# EAGLE board Zcontrol5XR2_Production_Mirror (EAGLE 5.10)
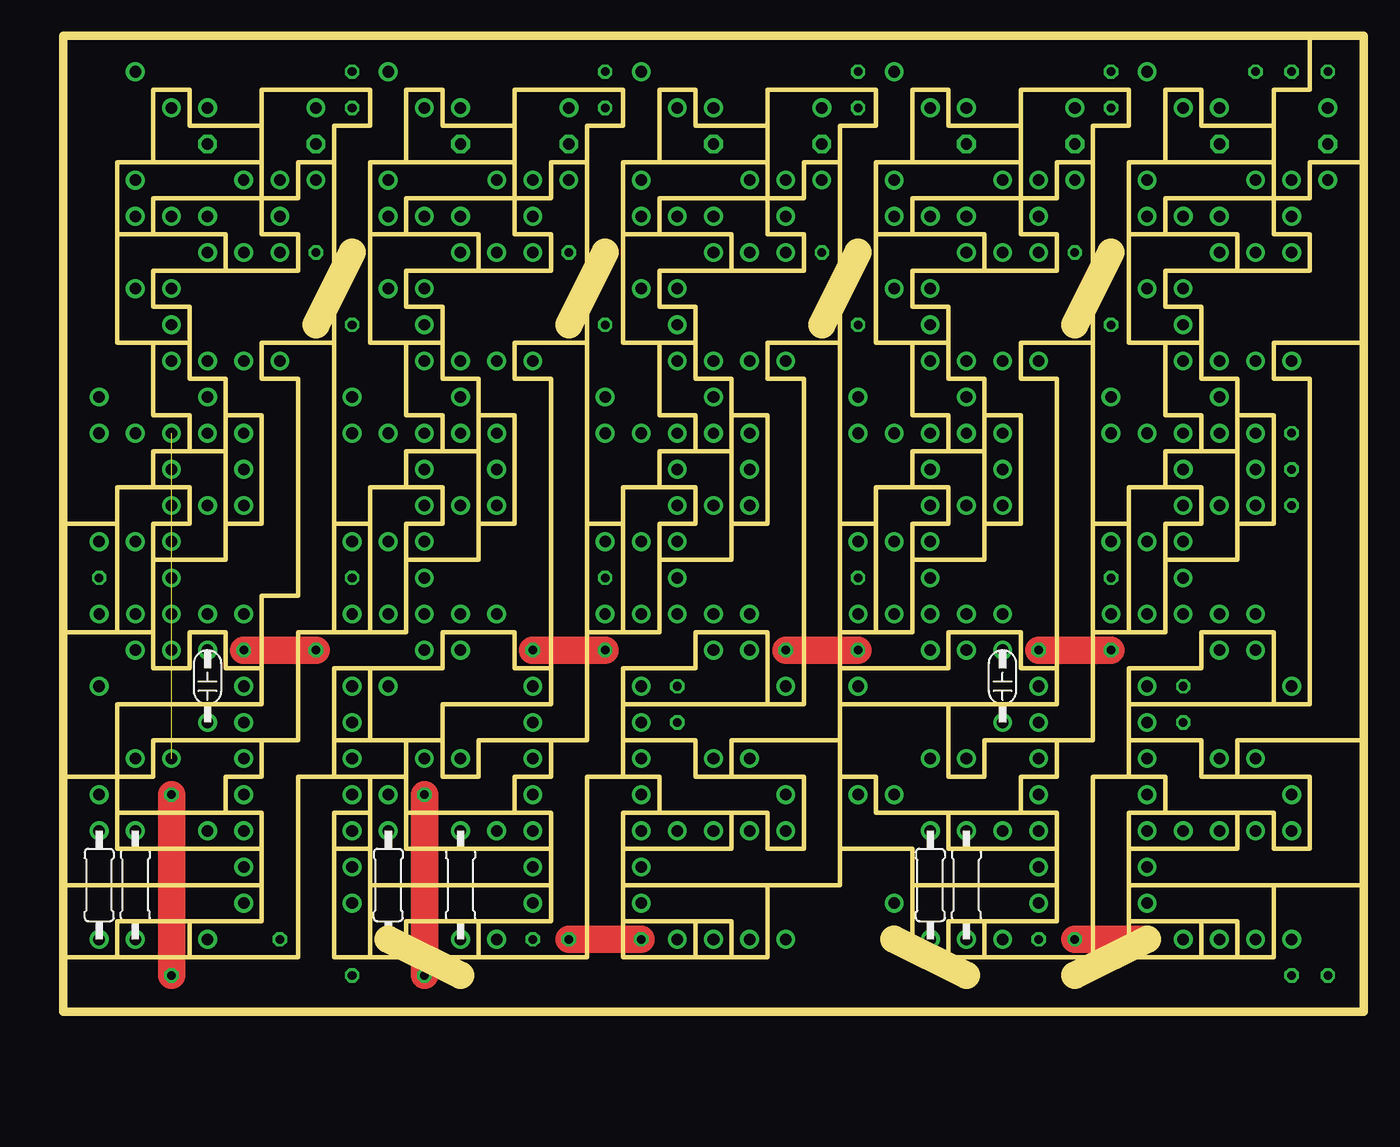
[diagram p0: board, top side]
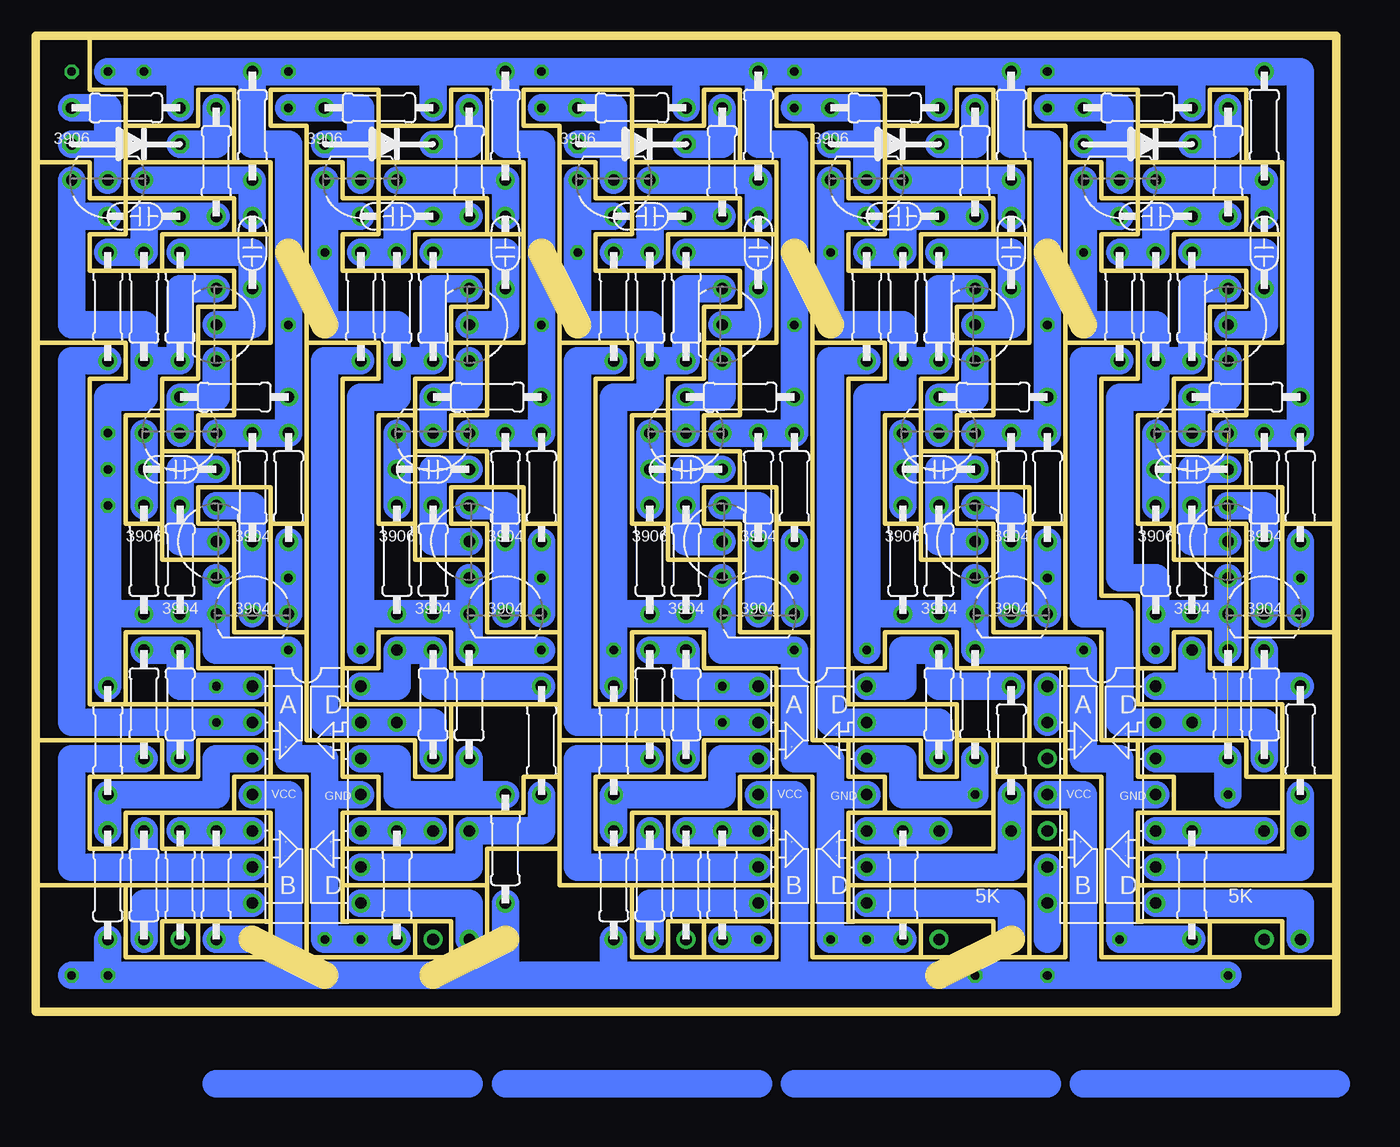
[diagram p1: board, bottom side, seen from below]

Size 91.44 x 68.58 mm. Coordinates in mm from the lower left corner, seen from the top.
Outline: 0,3.81 0,0 91.44,0 91.44,8.89
Outline: 0,3.81 0,8.89
Outline: 0,8.89 0,16.51
Outline: 0,16.51 0,26.67
Outline: 0,26.67 0,34.29
Outline: 0,34.29 0,68.58 87.63,68.58
Outline: 87.63,68.58 91.44,68.58 91.44,59.69
Outline: 91.44,59.69 91.44,46.99
Outline: 91.44,46.99 91.44,19.05
Outline: 91.44,19.05 91.44,8.89
Outline: 91.44,8.89 85.09,8.89
Outline: 85.09,8.89 85.09,3.81 82.55,3.81
Outline: 82.55,3.81 80.01,3.81
Outline: 80.01,3.81 74.93,3.81 74.93,6.35
Outline: 74.93,6.35 74.93,8.89
Outline: 74.93,8.89 74.93,11.43
Outline: 74.93,11.43 74.93,13.97 77.47,13.97
Outline: 77.47,13.97 77.47,16.51 74.93,16.51
Outline: 74.93,16.51 72.39,16.51 72.39,3.81 64.77,3.81
Outline: 64.77,3.81 62.23,3.81
Outline: 62.23,3.81 59.69,3.81 59.69,8.89
Outline: 46.99,3.81 49.53,3.81 49.53,8.89
Outline: 46.99,3.81 44.45,3.81
Outline: 44.45,3.81 39.37,3.81 39.37,6.35
Outline: 39.37,6.35 39.37,8.89
Outline: 39.37,8.89 39.37,11.43
Outline: 39.37,11.43 39.37,13.97 41.91,13.97
Outline: 41.91,13.97 41.91,16.51 39.37,16.51
Outline: 39.37,16.51 36.83,16.51 36.83,3.81 29.21,3.81
Outline: 29.21,3.81 24.13,3.81
Outline: 24.13,3.81 21.59,3.81
Outline: 21.59,3.81 19.05,3.81 19.05,11.43
Outline: 19.05,11.43 19.05,13.97 21.59,13.97
Outline: 21.59,13.97 21.59,16.51
Outline: 21.59,16.51 19.05,16.51
Outline: 19.05,16.51 16.51,16.51 16.51,3.81 8.89,3.81
Outline: 8.89,3.81 3.81,3.81
Outline: 3.81,3.81 0,3.81
Outline: 29.21,3.81 29.21,6.35
Outline: 29.21,6.35 34.29,6.35 34.29,8.89
Outline: 34.29,8.89 34.29,11.43
Outline: 34.29,11.43 34.29,13.97 31.75,13.97
Outline: 31.75,13.97 31.75,16.51 34.29,16.51 34.29,19.05
Outline: 34.29,19.05 36.83,19.05 36.83,26.67
Outline: 36.83,26.67 39.37,26.67
Outline: 39.37,26.67 41.91,26.67 41.91,31.75
Outline: 46.99,41.91 49.53,41.91 49.53,34.29 46.99,34.29
Outline: 46.99,41.91 46.99,44.45 44.45,44.45 44.45,46.99
Outline: 44.45,46.99 44.45,49.53 41.91,49.53 41.91,52.07 46.99,52.07
Outline: 46.99,52.07 52.07,52.07 52.07,54.61 49.53,54.61 49.53,57.15
Outline: 49.53,57.15 52.07,57.15 52.07,59.69 54.61,59.69
Outline: 54.61,59.69 54.61,46.99
Outline: 54.61,46.99 49.53,46.99 49.53,44.45 52.07,44.45 52.07,21.59 49.53,21.59
Outline: 49.53,21.59 49.53,26.67 44.45,26.67 44.45,24.13 39.37,24.13 39.37,21.59
Outline: 39.37,21.59 39.37,19.05
Outline: 39.37,19.05 39.37,16.51
Outline: 39.37,21.59 49.53,21.59
Outline: 39.37,19.05 44.45,19.05 44.45,16.51 46.99,16.51
Outline: 46.99,16.51 46.99,19.05 54.61,19.05
Outline: 54.61,19.05 54.61,21.59
Outline: 54.61,21.59 54.61,24.13
Outline: 54.61,24.13 54.61,26.67
Outline: 54.61,26.67 54.61,34.29
Outline: 54.61,34.29 54.61,46.99
Outline: 39.37,8.89 49.53,8.89
Outline: 46.99,3.81 46.99,6.35 44.45,6.35
Outline: 44.45,6.35 39.37,6.35
Outline: 44.45,6.35 44.45,3.81
Outline: 21.59,3.81 21.59,8.89
Outline: 21.59,8.89 21.59,11.43
Outline: 21.59,11.43 21.59,13.97
Outline: 19.05,11.43 21.59,11.43
Outline: 21.59,8.89 34.29,8.89
Outline: 29.21,6.35 24.13,6.35 24.13,3.81
Outline: 34.29,11.43 24.13,11.43 24.13,13.97
Outline: 24.13,13.97 31.75,13.97
Outline: 34.29,19.05 29.21,19.05 29.21,16.51 26.67,16.51 26.67,19.05
Outline: 26.67,19.05 24.13,19.05
Outline: 24.13,19.05 24.13,16.51
Outline: 24.13,16.51 24.13,13.97
Outline: 21.59,16.51 24.13,16.51
Outline: 19.05,16.51 19.05,19.05
Outline: 19.05,19.05 21.59,19.05
Outline: 21.59,19.05 24.13,19.05
Outline: 19.05,19.05 19.05,24.13 21.59,24.13
Outline: 21.59,24.13 21.59,19.05
Outline: 26.67,19.05 26.67,21.59 34.29,21.59 34.29,24.13
Outline: 34.29,24.13 31.75,24.13 31.75,26.67 26.67,26.67 26.67,24.13 21.59,24.13
Outline: 0,8.89 13.97,8.89
Outline: 13.97,8.89 13.97,6.35 8.89,6.35
Outline: 8.89,6.35 3.81,6.35 3.81,3.81
Outline: 8.89,3.81 8.89,6.35
Outline: 13.97,8.89 13.97,11.43
Outline: 13.97,11.43 13.97,13.97 11.43,13.97
Outline: 11.43,13.97 11.43,16.51 13.97,16.51 13.97,19.05
Outline: 13.97,19.05 16.51,19.05 16.51,26.67 19.05,26.67
Outline: 19.05,26.67 21.59,26.67
Outline: 21.59,26.67 24.13,26.67 24.13,31.75
Outline: 24.13,31.75 29.21,31.75 29.21,34.29
Outline: 29.21,34.29 31.75,34.29 31.75,41.91 29.21,41.91
Outline: 29.21,41.91 29.21,44.45 26.67,44.45 26.67,46.99
Outline: 26.67,46.99 26.67,49.53 24.13,49.53 24.13,52.07 29.21,52.07
Outline: 29.21,52.07 34.29,52.07 34.29,54.61 31.75,54.61 31.75,57.15
Outline: 31.75,57.15 34.29,57.15 34.29,59.69 36.83,59.69
Outline: 36.83,59.69 36.83,46.99
Outline: 36.83,46.99 31.75,46.99 31.75,44.45 34.29,44.45 34.29,24.13
Outline: 19.05,26.67 19.05,34.29
Outline: 19.05,34.29 21.59,34.29
Outline: 21.59,34.29 21.59,26.67
Outline: 21.59,34.29 21.59,36.83 24.13,36.83
Outline: 24.13,36.83 26.67,36.83 26.67,34.29 24.13,34.29 24.13,31.75
Outline: 24.13,36.83 24.13,39.37 26.67,39.37
Outline: 26.67,39.37 29.21,39.37
Outline: 29.21,39.37 29.21,34.29
Outline: 29.21,39.37 29.21,41.91
Outline: 26.67,39.37 26.67,41.91 24.13,41.91 24.13,46.99
Outline: 24.13,46.99 21.59,46.99 21.59,54.61
Outline: 24.13,46.99 26.67,46.99
Outline: 19.05,46.99 19.05,59.69
Outline: 19.05,59.69 19.05,62.23 21.59,62.23 21.59,64.77 13.97,64.77 13.97,62.23
Outline: 13.97,62.23 8.89,62.23 8.89,64.77 6.35,64.77 6.35,59.69
Outline: 3.81,54.61 3.81,59.69 6.35,59.69
Outline: 3.81,54.61 3.81,46.99 6.35,46.99
Outline: 8.89,39.37 8.89,41.91 6.35,41.91 6.35,46.99
Outline: 8.89,39.37 6.35,39.37 6.35,36.83
Outline: 21.59,54.61 21.59,59.69 24.13,59.69
Outline: 31.75,62.23 26.67,62.23 26.67,64.77 24.13,64.77 24.13,59.69
Outline: 31.75,62.23 31.75,64.77 39.37,64.77 39.37,62.23 36.83,62.23 36.83,59.69
Outline: 21.59,54.61 24.13,54.61
Outline: 24.13,54.61 29.21,54.61 29.21,52.07
Outline: 24.13,54.61 24.13,57.15 31.75,57.15
Outline: 31.75,57.15 31.75,59.69
Outline: 31.75,62.23 31.75,59.69
Outline: 31.75,59.69 24.13,59.69
Outline: 54.61,59.69 54.61,62.23 57.15,62.23 57.15,64.77 49.53,64.77 49.53,62.23
Outline: 49.53,59.69 49.53,57.15
Outline: 49.53,57.15 41.91,57.15 41.91,54.61
Outline: 41.91,54.61 46.99,54.61 46.99,52.07
Outline: 49.53,59.69 41.91,59.69
Outline: 41.91,59.69 39.37,59.69 39.37,54.61
Outline: 39.37,54.61 39.37,46.99 41.91,46.99
Outline: 41.91,46.99 41.91,41.91 44.45,41.91 44.45,39.37
Outline: 44.45,39.37 41.91,39.37 41.91,36.83
Outline: 41.91,46.99 44.45,46.99
Outline: 41.91,54.61 39.37,54.61
Outline: 41.91,59.69 41.91,64.77 44.45,64.77 44.45,62.23 49.53,62.23
Outline: 49.53,62.23 49.53,59.69
Outline: 6.35,59.69 13.97,59.69
Outline: 13.97,59.69 13.97,62.23
Outline: 3.81,54.61 6.35,54.61
Outline: 6.35,54.61 6.35,57.15 13.97,57.15
Outline: 13.97,57.15 13.97,59.69
Outline: 13.97,57.15 16.51,57.15 16.51,59.69 19.05,59.69
Outline: 67.31,62.23 67.31,59.69
Outline: 67.31,59.69 59.69,59.69
Outline: 59.69,59.69 59.69,64.77 62.23,64.77 62.23,62.23 67.31,62.23
Outline: 67.31,62.23 67.31,64.77 74.93,64.77 74.93,62.23 72.39,62.23 72.39,59.69
Outline: 72.39,59.69 69.85,59.69 69.85,57.15 67.31,57.15
Outline: 67.31,57.15 67.31,59.69
Outline: 59.69,59.69 57.15,59.69 57.15,54.61
Outline: 57.15,54.61 57.15,46.99 59.69,46.99
Outline: 59.69,46.99 59.69,41.91 62.23,41.91 62.23,39.37
Outline: 62.23,39.37 59.69,39.37 59.69,36.83
Outline: 91.44,59.69 87.63,59.69 87.63,57.15 85.09,57.15
Outline: 85.09,57.15 85.09,59.69
Outline: 85.09,59.69 85.09,62.23
Outline: 85.09,62.23 85.09,64.77 87.63,64.77 87.63,68.58
Outline: 77.47,59.69 74.93,59.69 74.93,54.61
Outline: 74.93,54.61 74.93,46.99 77.47,46.99
Outline: 77.47,46.99 77.47,41.91 80.01,41.91 80.01,39.37
Outline: 80.01,39.37 77.47,39.37 77.47,36.83
Outline: 72.39,46.99 72.39,59.69
Outline: 77.47,59.69 77.47,64.77 80.01,64.77 80.01,62.23 85.09,62.23
Outline: 85.09,59.69 77.47,59.69
Outline: 85.09,57.15 77.47,57.15 77.47,54.61
Outline: 77.47,54.61 74.93,54.61
Outline: 67.31,57.15 59.69,57.15 59.69,54.61
Outline: 59.69,54.61 57.15,54.61
Outline: 85.09,57.15 85.09,54.61 87.63,54.61 87.63,52.07 82.55,52.07
Outline: 82.55,52.07 82.55,54.61 77.47,54.61
Outline: 67.31,57.15 67.31,54.61 69.85,54.61 69.85,52.07 64.77,52.07
Outline: 64.77,52.07 64.77,54.61 59.69,54.61
Outline: 72.39,46.99 67.31,46.99 67.31,44.45 69.85,44.45 69.85,24.13
Outline: 69.85,24.13 69.85,21.59 62.23,21.59
Outline: 62.23,21.59 62.23,16.51 64.77,16.51 64.77,19.05 69.85,19.05
Outline: 69.85,19.05 72.39,19.05 72.39,26.67
Outline: 72.39,26.67 72.39,34.29
Outline: 72.39,34.29 72.39,46.99
Outline: 85.09,21.59 87.63,21.59 87.63,44.45 85.09,44.45 85.09,46.99 91.44,46.99
Outline: 85.09,21.59 74.93,21.59
Outline: 74.93,21.59 74.93,19.05
Outline: 74.93,19.05 80.01,19.05 80.01,16.51 82.55,16.51
Outline: 82.55,16.51 82.55,19.05 91.44,19.05
Outline: 77.47,46.99 80.01,46.99
Outline: 80.01,46.99 80.01,49.53 77.47,49.53 77.47,52.07 82.55,52.07
Outline: 59.69,46.99 62.23,46.99
Outline: 62.23,46.99 62.23,49.53 59.69,49.53 59.69,52.07 64.77,52.07
Outline: 6.35,46.99 8.89,46.99
Outline: 8.89,46.99 8.89,49.53 6.35,49.53 6.35,52.07 11.43,52.07
Outline: 11.43,52.07 11.43,54.61 6.35,54.61
Outline: 11.43,52.07 16.51,52.07 16.51,54.61 13.97,54.61 13.97,57.15
Outline: 11.43,34.29 13.97,34.29 13.97,41.91 11.43,41.91
Outline: 11.43,34.29 11.43,39.37
Outline: 11.43,39.37 11.43,41.91
Outline: 46.99,34.29 46.99,39.37
Outline: 46.99,39.37 46.99,41.91
Outline: 64.77,41.91 67.31,41.91 67.31,34.29 64.77,34.29
Outline: 64.77,41.91 64.77,39.37
Outline: 64.77,39.37 64.77,34.29
Outline: 82.55,34.29 85.09,34.29 85.09,41.91 82.55,41.91
Outline: 82.55,34.29 82.55,39.37
Outline: 82.55,39.37 82.55,41.91
Outline: 82.55,39.37 80.01,39.37
Outline: 64.77,39.37 62.23,39.37
Outline: 44.45,39.37 46.99,39.37
Outline: 8.89,39.37 11.43,39.37
Outline: 11.43,41.91 11.43,44.45 8.89,44.45 8.89,46.99
Outline: 82.55,34.29 82.55,31.75 77.47,31.75
Outline: 77.47,31.75 77.47,34.29 80.01,34.29 80.01,36.83 77.47,36.83
Outline: 64.77,34.29 64.77,31.75 59.69,31.75
Outline: 59.69,31.75 59.69,34.29 62.23,34.29 62.23,36.83 59.69,36.83
Outline: 41.91,31.75 41.91,34.29 44.45,34.29 44.45,36.83 41.91,36.83
Outline: 41.91,31.75 46.99,31.75 46.99,34.29
Outline: 11.43,34.29 11.43,31.75 6.35,31.75
Outline: 6.35,31.75 6.35,34.29 8.89,34.29 8.89,36.83 6.35,36.83
Outline: 72.39,26.67 74.93,26.67
Outline: 74.93,26.67 74.93,34.29
Outline: 74.93,34.29 72.39,34.29
Outline: 54.61,26.67 57.15,26.67
Outline: 57.15,26.67 57.15,34.29
Outline: 57.15,34.29 54.61,34.29
Outline: 36.83,26.67 36.83,34.29
Outline: 36.83,34.29 39.37,34.29
Outline: 39.37,34.29 39.37,26.67
Outline: 3.81,26.67 0,26.67
Outline: 3.81,26.67 3.81,34.29
Outline: 3.81,34.29 0,34.29
Outline: 3.81,34.29 3.81,36.83 6.35,36.83
Outline: 6.35,31.75 6.35,26.67
Outline: 6.35,26.67 3.81,26.67
Outline: 39.37,34.29 39.37,36.83 41.91,36.83
Outline: 57.15,26.67 59.69,26.67 59.69,31.75
Outline: 57.15,34.29 57.15,36.83 59.69,36.83
Outline: 74.93,26.67 77.47,26.67 77.47,31.75
Outline: 74.93,34.29 74.93,36.83 77.47,36.83
Outline: 36.83,34.29 36.83,46.99
Outline: 19.05,34.29 19.05,46.99
Outline: 19.05,46.99 13.97,46.99 13.97,44.45 16.51,44.45 16.51,29.21 13.97,29.21 13.97,24.13
Outline: 13.97,24.13 13.97,21.59 3.81,21.59 3.81,16.51
Outline: 3.81,16.51 6.35,16.51 6.35,19.05 13.97,19.05
Outline: 11.43,13.97 3.81,13.97
Outline: 3.81,13.97 3.81,16.51
Outline: 3.81,16.51 0,16.51
Outline: 13.97,11.43 3.81,11.43 3.81,13.97
Outline: 13.97,24.13 11.43,24.13 11.43,26.67 8.89,26.67 8.89,24.13 6.35,24.13 6.35,26.67
Outline: 49.53,8.89 54.61,8.89 54.61,11.43
Outline: 54.61,11.43 54.61,16.51
Outline: 54.61,16.51 54.61,19.05
Outline: 46.99,16.51 52.07,16.51 52.07,11.43 49.53,11.43 49.53,13.97 46.99,13.97
Outline: 46.99,13.97 46.99,11.43 39.37,11.43
Outline: 41.91,13.97 46.99,13.97
Outline: 69.85,19.05 69.85,16.51 67.31,16.51 67.31,13.97
Outline: 67.31,13.97 69.85,13.97 69.85,11.43
Outline: 69.85,11.43 69.85,8.89
Outline: 69.85,8.89 69.85,6.35 64.77,6.35
Outline: 64.77,6.35 64.77,3.81
Outline: 62.23,3.81 62.23,6.35 64.77,6.35
Outline: 69.85,8.89 59.69,8.89
Outline: 59.69,8.89 59.69,11.43 54.61,11.43
Outline: 69.85,11.43 62.23,11.43 62.23,13.97
Outline: 62.23,13.97 57.15,13.97 57.15,16.51 54.61,16.51
Outline: 62.23,13.97 67.31,13.97
Outline: 62.23,21.59 54.61,21.59
Outline: 54.61,24.13 62.23,24.13 62.23,26.67 67.31,26.67 67.31,24.13 69.85,24.13
Outline: 74.93,21.59 74.93,24.13 80.01,24.13 80.01,26.67 85.09,26.67 85.09,21.59
Outline: 82.55,41.91 82.55,44.45 80.01,44.45 80.01,46.99
Outline: 80.01,3.81 80.01,6.35
Outline: 80.01,6.35 82.55,6.35 82.55,3.81
Outline: 85.09,8.89 74.93,8.89
Outline: 74.93,6.35 80.01,6.35
Outline: 74.93,11.43 82.55,11.43 82.55,13.97
Outline: 82.55,13.97 85.09,13.97 85.09,11.43 87.63,11.43 87.63,16.51 82.55,16.51
Outline: 77.47,13.97 82.55,13.97
Outline: 74.93,19.05 74.93,16.51
Outline: 64.77,41.91 64.77,44.45 62.23,44.45 62.23,46.99
Copper layers (1*16): Top 0.035mm / dielectric 1.5mm / Bottom 0.035mm
Design rules "default": minimum track width 10mil, minimum drill 24mil, track to track 8mil, track to pad 8mil, pad to pad 8mil, via to via 8mil, smd to smd 8mil, copper to edge 40mil, drill to drill 8mil, minimum pad ring 10mil, minimum via ring 8mil, stop-mask expansion 4mil, vias tented up to drill 0mil, thermal gap 10mil
Milling: 7 lines

## Footprints (pad centres in the part's own frame; a part is rotated, then mirrored left to right if it is on the bottom)
SMALL-CAPACITOR = drill 0.813 round: IN1 0,0; IN2 5.08,0
TRANSISTOR = drill 0.8 round: P$1 0,0; P$2 2.54,0; P$3 -2.54,0
DIODE = drill 0.8 octagon: P$1 -3.81,0; P$2 3.81,0
RESISTOR = drill 0.813 round: IN1 -3.81,0; IN2 3.81,0
LM324-QUAD-OPAMP = drill 0.813 round: AMINUS -3.81,5.08; AOUT -3.81,7.62; APLUS -3.81,2.54; BMINUS -3.81,-5.08; BOUT -3.81,-7.62; BPLUS -3.81,-2.54; CMINUS 3.81,5.08; COUT 3.81,7.62; CPLUS 3.81,2.54; DMINUS 3.81,-5.08; DOUT 3.81,-7.62; DPLUS 3.81,-2.54; GND 3.81,0; VCC -3.81,0

## Placement (x,y rotation side)
E$2  50nF  [SMALL-CAPACITOR]  66.04,20.32 90 top
E$3  [TRANSISTOR]  86.36,58.42 180 bottom
E$5  [DIODE]  85.09,60.96 0 bottom
E$7  4k  [RESISTOR]  85.09,63.5 180 bottom
E$9  910  [RESISTOR]  78.74,59.69 270 bottom
E$10  2.2uF  [SMALL-CAPACITOR]  81.28,55.88 180 bottom
E$11  [LM324-QUAD-OPAMP]  72.39,15.24 0 bottom
E$15  100k  [RESISTOR]  83.82,49.53 90 bottom
E$16  100k  [RESISTOR]  86.36,49.53 270 bottom
E$18  [TRANSISTOR]  68.58,58.42 180 bottom
E$19  200k  [RESISTOR]  81.28,21.59 270 bottom
E$20  2k  [RESISTOR]  86.36,19.05 90 bottom
E$21  5k  [RESISTOR]  86.36,8.89 270 bottom
E$22  2k  [RESISTOR]  83.82,21.59 270 bottom
E$23  2k  [RESISTOR]  83.82,8.89 270 bottom
E$29  2k  [RESISTOR]  78.74,8.89 270 bottom
E$30  20k  [RESISTOR]  81.28,8.89 270 bottom
E$31  10K  [RESISTOR]  76.2,62.23 270 bottom
E$32  500Pf  [SMALL-CAPACITOR]  76.2,50.8 90 bottom
E$33  100K  [RESISTOR]  81.28,49.53 90 bottom
E$34  [TRANSISTOR]  78.74,48.26 270 bottom
E$35  2k  [RESISTOR]  77.47,43.18 0 bottom
E$36  [TRANSISTOR]  81.28,40.64 180 bottom
E$37  22Pf  [SMALL-CAPACITOR]  78.74,38.1 180 bottom
E$38  4k  [RESISTOR]  67.31,63.5 180 bottom
E$40  100k  [RESISTOR]  81.28,31.75 90 bottom
E$43  [TRANSISTOR]  78.74,33.02 90 bottom
E$44  2k  [RESISTOR]  76.2,36.83 90 bottom
E$45  [TRANSISTOR]  76.2,27.94 0 bottom
E$46  2k  [RESISTOR]  73.66,36.83 90 bottom
E$47  200k  [RESISTOR]  63.5,21.59 270 bottom
E$48  2k  [RESISTOR]  60.96,21.59 90 bottom
E$49  5k  [RESISTOR]  58.42,11.43 270 bottom
E$50  2k  [RESISTOR]  55.88,19.05 270 bottom
E$52  2k  [RESISTOR]  60.96,8.89 270 top
E$53  2k  [RESISTOR]  66.04,8.89 270 bottom
E$54  20k  [RESISTOR]  63.5,8.89 270 top
E$55  [DIODE]  67.31,60.96 0 bottom
E$56  910  [RESISTOR]  60.96,59.69 270 bottom
E$57  2.2uF  [SMALL-CAPACITOR]  63.5,55.88 180 bottom
E$58  100k  [RESISTOR]  66.04,49.53 90 bottom
E$59  100k  [RESISTOR]  68.58,49.53 270 bottom
E$60  10K  [RESISTOR]  58.42,62.23 270 bottom
E$61  500Pf  [SMALL-CAPACITOR]  58.42,50.8 90 bottom
E$62  100K  [RESISTOR]  63.5,49.53 90 bottom
E$63  [TRANSISTOR]  60.96,48.26 270 bottom
E$64  2k  [RESISTOR]  59.69,43.18 0 bottom
E$65  [TRANSISTOR]  63.5,40.64 180 bottom
E$66  100k  [RESISTOR]  63.5,31.75 90 bottom
E$67  [TRANSISTOR]  60.96,33.02 90 bottom
E$68  2k  [RESISTOR]  58.42,36.83 90 bottom
E$69  [TRANSISTOR]  58.42,27.94 0 bottom
E$70  2k  [RESISTOR]  55.88,36.83 90 bottom
E$71  2k  [RESISTOR]  66.04,31.75 270 bottom
E$72  22Pf  [SMALL-CAPACITOR]  60.96,38.1 180 bottom
E$73  [LM324-QUAD-OPAMP]  36.83,15.24 0 bottom
E$74  [TRANSISTOR]  50.8,58.42 180 bottom
E$75  2k  [RESISTOR]  83.82,31.75 270 bottom
E$76  4k  [RESISTOR]  49.53,63.5 180 bottom
E$77  [DIODE]  49.53,60.96 0 bottom
E$78  910  [RESISTOR]  43.18,59.69 270 bottom
E$79  2.2uF  [SMALL-CAPACITOR]  45.72,55.88 180 bottom
E$80  100k  [RESISTOR]  48.26,49.53 90 bottom
E$81  100k  [RESISTOR]  50.8,49.53 270 bottom
E$82  200k  [RESISTOR]  45.72,21.59 270 bottom
E$83  2k  [RESISTOR]  50.8,19.05 90 bottom
E$84  5k  [RESISTOR]  50.8,8.89 270 bottom
E$85  2k  [RESISTOR]  48.26,21.59 270 bottom
E$86  2k  [RESISTOR]  48.26,8.89 270 bottom
E$87  2k  [RESISTOR]  43.18,8.89 270 bottom
E$88  20k  [RESISTOR]  45.72,8.89 270 bottom
E$89  10K  [RESISTOR]  40.64,62.23 270 bottom
E$90  500Pf  [SMALL-CAPACITOR]  40.64,50.8 90 bottom
E$91  100K  [RESISTOR]  45.72,49.53 90 bottom
E$92  [TRANSISTOR]  43.18,48.26 270 bottom
E$93  2k  [RESISTOR]  41.91,43.18 0 bottom
E$94  [TRANSISTOR]  45.72,40.64 180 bottom
E$95  100k  [RESISTOR]  45.72,31.75 90 bottom
E$96  [TRANSISTOR]  43.18,33.02 90 bottom
E$97  2k  [RESISTOR]  40.64,36.83 90 bottom
E$98  [TRANSISTOR]  40.64,27.94 0 bottom
E$99  2k  [RESISTOR]  38.1,36.83 90 bottom
E$100  200k  [RESISTOR]  5.08,21.59 270 bottom
E$101  200k  [RESISTOR]  27.94,21.59 270 bottom
E$102  2k  [RESISTOR]  25.4,21.59 90 bottom
E$104  2k  [RESISTOR]  22.86,19.05 270 bottom
E$105  2k  [RESISTOR]  22.86,8.89 270 top
E$106  2k  [RESISTOR]  30.48,8.89 270 bottom
E$107  20k  [RESISTOR]  27.94,8.89 270 top
E$108  2k  [RESISTOR]  48.26,31.75 270 bottom
E$109  22Pf  [SMALL-CAPACITOR]  43.18,38.1 180 bottom
E$110  [TRANSISTOR]  33.02,58.42 180 bottom
E$111  4k  [RESISTOR]  31.75,63.5 180 bottom
E$112  [DIODE]  31.75,60.96 0 bottom
E$113  910  [RESISTOR]  25.4,59.69 270 bottom
E$114  2.2uF  [SMALL-CAPACITOR]  27.94,55.88 180 bottom
E$115  100k  [RESISTOR]  30.48,49.53 90 bottom
E$116  100k  [RESISTOR]  33.02,49.53 270 bottom
E$117  10K  [RESISTOR]  22.86,62.23 270 bottom
E$118  500Pf  [SMALL-CAPACITOR]  22.86,50.8 90 bottom
E$119  100K  [RESISTOR]  27.94,49.53 90 bottom
E$120  [TRANSISTOR]  25.4,48.26 270 bottom
E$121  2k  [RESISTOR]  24.13,43.18 0 bottom
E$122  [TRANSISTOR]  27.94,40.64 180 bottom
E$123  100k  [RESISTOR]  27.94,31.75 90 bottom
E$124  [TRANSISTOR]  25.4,33.02 90 bottom
E$125  2k  [RESISTOR]  22.86,36.83 90 bottom
E$126  [TRANSISTOR]  22.86,27.94 0 bottom
E$127  2k  [RESISTOR]  20.32,36.83 90 bottom
E$128  2k  [RESISTOR]  30.48,31.75 270 bottom
E$129  22Pf  [SMALL-CAPACITOR]  25.4,38.1 180 bottom
E$156  [LM324-QUAD-OPAMP]  16.51,15.24 0 bottom
E$157  50nF  [SMALL-CAPACITOR]  10.16,20.32 90 top
E$159  2k  [RESISTOR]  7.62,21.59 90 bottom
E$161  2k  [RESISTOR]  2.54,19.05 270 bottom
E$162  2k  [RESISTOR]  2.54,8.89 270 top
E$163  2k  [RESISTOR]  10.16,8.89 270 bottom
E$166  20k  [RESISTOR]  5.08,8.89 270 top
E$167  [TRANSISTOR]  15.24,58.42 180 bottom
E$168  4k  [RESISTOR]  13.97,63.5 180 bottom
E$169  [DIODE]  13.97,60.96 0 bottom
E$170  910  [RESISTOR]  7.62,59.69 270 bottom
E$171  2.2uF  [SMALL-CAPACITOR]  10.16,55.88 180 bottom
E$172  100k  [RESISTOR]  12.7,49.53 90 bottom
E$173  100k  [RESISTOR]  15.24,49.53 270 bottom
E$174  10K  [RESISTOR]  5.08,62.23 270 bottom
E$175  500Pf  [SMALL-CAPACITOR]  5.08,50.8 90 bottom
E$176  100K  [RESISTOR]  10.16,49.53 90 bottom
E$177  [TRANSISTOR]  7.62,48.26 270 bottom
E$178  2k  [RESISTOR]  6.35,43.18 0 bottom
E$179  [TRANSISTOR]  10.16,40.64 180 bottom
E$180  100k  [RESISTOR]  10.16,31.75 90 bottom
E$181  [TRANSISTOR]  7.62,33.02 90 bottom
E$182  2k  [RESISTOR]  5.08,36.83 90 bottom
E$183  [TRANSISTOR]  5.08,27.94 0 bottom
E$184  2k  [RESISTOR]  2.54,36.83 90 bottom
E$185  2k  [RESISTOR]  12.7,31.75 270 bottom
E$186  22Pf  [SMALL-CAPACITOR]  7.62,38.1 180 bottom

## Library data of the parts
E$2 E$3 E$5 E$7 E$9-E$11 E$15 E$16 E$18-E$23 E$29-E$38 E$40 E$43-E$50 E$52-E$102 E$104-E$129 E$156 E$157 E$159 E$161-E$163 E$166-E$186 = RussellLibrary

## Nets
GND4: E$3.P$2 E$10.IN2 E$11.GND E$15.IN1 E$18.P$2 E$20.IN2 E$29.IN2 E$33.IN1 E$34.P$3 E$40.IN1 E$43.P$3 E$45.P$3 E$48.IN2 E$53.IN2 E$57.IN2 E$58.IN1 E$62.IN1 E$63.P$3 E$66.IN1 E$67.P$3 E$69.P$3 E$73.GND E$74.P$2 E$79.IN2 E$80.IN1 E$83.IN2 E$87.IN2 E$91.IN1 E$92.P$3 E$95.IN1 E$96.P$3 E$98.P$3 E$102.IN2 E$106.IN2 E$110.P$2 E$114.IN2 E$115.IN1 E$119.IN1 E$120.P$3 E$123.IN1 E$124.P$3 E$126.P$3 E$156.GND E$159.IN2 E$163.IN2 E$167.P$2 E$171.IN2 E$172.IN1 E$176.IN1 E$177.P$3 E$180.IN1 E$181.P$3 E$183.P$3
S$1: E$3.P$1 E$5.P$1 E$7.IN2
S$2: E$5.P$2 E$9.IN1
S$4: E$9.IN2 E$10.IN1 E$15.IN2 E$16.IN1
S$5: E$11.AMINUS E$16.IN2 E$19.IN2
S$6: E$32.IN1 E$33.IN2 E$34.P$1
S$7: E$11.APLUS E$20.IN1 E$21.IN1
S$8: E$11.AOUT E$19.IN1 E$22.IN1
S$9: E$18.P$1 E$38.IN2 E$55.P$1
S$10: E$11.BMINUS E$22.IN2 E$23.IN1
S$11: E$11.BOUT E$23.IN2
S$12: E$11.BPLUS E$29.IN1 E$30.IN1
S$13: E$30.IN2
S$14: E$3.P$3 E$31.IN2 E$32.IN2
S$15: E$47.IN2 E$59.IN2
S$16: E$2.IN2 E$47.IN1 E$50.IN1
S$17: E$34.P$2 E$35.IN1 E$36.P$1
S$18: E$50.IN2 E$52.IN1
S$19: E$36.P$2 E$75.IN1
S$20: E$37.IN1 E$40.IN2 E$43.P$1
S$22: E$52.IN2
S$23: E$43.P$2 E$44.IN1 E$45.P$1
S$24: E$45.P$2 E$46.IN1
S$26: E$53.IN1 E$54.IN1
S$27: E$54.IN2
S$28: E$55.P$2 E$56.IN1
S$29: E$74.P$1 E$76.IN2 E$77.P$1
S$30: E$11.CPLUS E$48.IN1 E$49.IN1
S$31: E$18.P$3 E$60.IN2 E$61.IN2
S$32: E$61.IN1 E$62.IN2 E$63.P$1
S$33: E$63.P$2 E$64.IN1 E$65.P$1
S$34: E$66.IN2 E$67.P$1 E$72.IN1
S$35: E$67.P$2 E$68.IN1 E$69.P$1
S$36: E$69.P$2 E$70.IN1
S$37: E$65.P$2 E$71.IN1
S$38: E$56.IN2 E$57.IN1 E$58.IN2 E$59.IN1
S$39: E$77.P$2 E$78.IN1
S$40: E$73.AMINUS E$81.IN2 E$82.IN2
S$41: E$73.APLUS E$83.IN1 E$84.IN1
S$42: E$73.AOUT E$82.IN1 E$85.IN1
S$43: E$73.BMINUS E$85.IN2 E$86.IN1
S$44: E$73.BOUT E$86.IN2
S$45: E$73.BPLUS E$87.IN1 E$88.IN1
S$46: E$88.IN2
S$47: E$74.P$3 E$89.IN2 E$90.IN2
S$48: E$90.IN1 E$91.IN2 E$92.P$1
S$49: E$92.P$2 E$93.IN1 E$94.P$1
S$50: E$95.IN2 E$96.P$1 E$109.IN1
S$51: E$96.P$2 E$97.IN1 E$98.P$1
S$52: E$98.P$2 E$99.IN1
S$53: E$94.P$2 E$108.IN1
S$54: E$78.IN2 E$79.IN1 E$80.IN2 E$81.IN1
S$55: E$101.IN1 E$104.IN1
S$56: E$104.IN2 E$105.IN1
S$57: E$105.IN2
S$58: E$106.IN1 E$107.IN1
S$59: E$107.IN2
S$60: E$101.IN2 E$116.IN2
S$61: E$100.IN2 E$173.IN2
S$62: E$110.P$1 E$111.IN2 E$112.P$1
S$63: E$112.P$2 E$113.IN1
S$64: E$110.P$3 E$117.IN2 E$118.IN2
S$65: E$118.IN1 E$119.IN2 E$120.P$1
S$66: E$120.P$2 E$121.IN1 E$122.P$1
S$67: E$123.IN2 E$124.P$1 E$129.IN1
S$68: E$124.P$2 E$125.IN1 E$126.P$1
S$69: E$126.P$2 E$127.IN1
S$70: E$122.P$2 E$128.IN1
S$71: E$113.IN2 E$114.IN1 E$115.IN2 E$116.IN1
S$89: E$100.IN1 E$157.IN2 E$161.IN1
S$90: E$161.IN2 E$162.IN1
S$91: E$162.IN2
S$92: E$163.IN1 E$166.IN1
S$93: E$166.IN2
S$94: E$156.AMINUS E$156.AOUT
S$95: E$156.BMINUS E$156.BOUT
S$96: E$167.P$1 E$168.IN2 E$169.P$1
S$97: E$169.P$2 E$170.IN1
S$98: E$167.P$3 E$174.IN2 E$175.IN2
S$99: E$175.IN1 E$176.IN2 E$177.P$1
S$100: E$177.P$2 E$178.IN1 E$179.P$1
S$101: E$180.IN2 E$181.P$1 E$186.IN1
S$102: E$181.P$2 E$182.IN1 E$183.P$1
S$103: E$183.P$2 E$184.IN1
S$104: E$179.P$2 E$185.IN1
S$105: E$170.IN2 E$171.IN1 E$172.IN2 E$173.IN1
VCC2: E$7.IN1 E$11.VCC E$21.IN2 E$31.IN1 E$35.IN2 E$36.P$3 E$38.IN1 E$44.IN2 E$46.IN2 E$49.IN2 E$60.IN1 E$64.IN2 E$65.P$3 E$68.IN2 E$70.IN2 E$73.CPLUS E$73.VCC E$76.IN1 E$84.IN2 E$89.IN1 E$93.IN2 E$94.P$3 E$97.IN2 E$99.IN2 E$102.IN1 E$111.IN1 E$117.IN1 E$121.IN2 E$122.P$3 E$125.IN2 E$127.IN2 E$156.CPLUS E$156.VCC E$159.IN1 E$168.IN1 E$174.IN1 E$178.IN2 E$179.P$3 E$182.IN2 E$184.IN2

## Tracks (layer width: path | path; a pad name or v marks a point on that pad's centre or on a via)
GND4  (via drill 0.6)
  Top 1.93: v17.78,25.4 v12.7,25.4 | v38.1,25.4 v33.02,25.4 | v35.56,5.08 v40.64,5.08 | v55.88,25.4 v50.8,25.4 | v73.66,25.4 v68.58,25.4 | v76.2,5.08 v71.12,5.08
  Bottom 1.93: 17.78,55.88 E$167.P$2 | 17.78,55.88 v17.78,53.34 17.78,48.26 12.7,48.26 E$172.IN1 | 17.78,55.88 E$171.IN2 | E$172.IN1 E$176.IN1 10.16,50.8 E$177.P$3 | E$172.IN1 12.7,43.18 15.24,43.18 15.24,30.48 12.7,30.48 12.7,27.94 | 12.7,27.94 E$180.IN1 E$183.P$3 | E$183.P$3 E$181.P$3 | E$183.P$3 E$159.IN2 | 15.24,15.24 E$156.GND | 15.24,15.24 15.24,17.78 17.78,17.78 v17.78,25.4 E$102.IN2 E$126.P$3 | E$163.IN2 v15.24,5.08 15.24,15.24 | v12.7,25.4 12.7,27.94 | 35.56,55.88 E$110.P$2 | 35.56,55.88 v35.56,53.34 35.56,48.26 30.48,48.26 E$115.IN1 | 35.56,55.88 E$114.IN2 | E$115.IN1 E$119.IN1 27.94,50.8 E$120.P$3 | E$115.IN1 30.48,43.18 33.02,43.18 33.02,27.94 | E$126.P$3 E$124.P$3 | E$126.P$3 E$123.IN1 33.02,27.94 | 53.34,55.88 E$74.P$2 | 53.34,55.88 v53.34,53.34 53.34,48.26 48.26,48.26 E$80.IN1 | 53.34,55.88 E$79.IN2 | E$80.IN1 E$91.IN1 45.72,50.8 E$92.P$3 | E$80.IN1 48.26,43.18 50.8,43.18 50.8,27.94 | 50.8,27.94 v50.8,25.4 E$83.IN2 | E$98.P$3 E$96.P$3 | E$98.P$3 E$95.IN1 50.8,27.94 | 35.56,15.24 E$73.GND | 35.56,15.24 35.56,17.78 38.1,17.78 v38.1,25.4 43.18,25.4 E$98.P$3 | E$106.IN2 v33.02,5.08 v35.56,5.08 35.56,15.24 | v40.64,5.08 E$87.IN2 | v33.02,25.4 33.02,27.94 | 71.12,55.88 E$18.P$2 | 71.12,55.88 v71.12,53.34 71.12,48.26 66.04,48.26 E$58.IN1 | 71.12,55.88 E$57.IN2 | E$58.IN1 E$62.IN1 63.5,50.8 E$63.P$3 | E$58.IN1 66.04,43.18 68.58,43.18 68.58,27.94 | E$69.P$3 E$67.P$3 | E$69.P$3 E$66.IN1 68.58,27.94 | E$69.P$3 E$48.IN2 v55.88,25.4 | 88.9,55.88 E$3.P$2 | 88.9,55.88 88.9,48.26 83.82,48.26 E$15.IN1 | 88.9,55.88 E$10.IN2 | E$15.IN1 E$33.IN1 81.28,50.8 E$34.P$3 | E$15.IN1 83.82,43.18 86.36,43.18 v86.36,40.64 v86.36,38.1 v86.36,35.56 86.36,27.94
  Bottom 1.93: 86.36,27.94 E$20.IN2 | E$45.P$3 E$43.P$3 | E$45.P$3 E$40.IN1 86.36,27.94 | 71.12,15.24 E$11.GND | 71.12,15.24 71.12,17.78 73.66,17.78 v73.66,25.4 78.74,25.4 E$45.P$3 | E$53.IN2 v68.58,5.08 v71.12,5.08 71.12,15.24 | E$29.IN2 v76.2,5.08 | v68.58,25.4 68.58,27.94
S$1
  Bottom 1.93: E$7.IN2 86.36,63.5 86.36,60.96 | E$3.P$1 86.36,60.96 | 86.36,60.96 E$5.P$1
S$2
  Bottom 1.93: E$5.P$2 78.74,60.96 E$9.IN1
S$3
  Bottom 1.93: 20.32,-5.08 38.1,-5.08
S$4
  Bottom 1.93: E$9.IN2 E$10.IN1 83.82,55.88 E$15.IN2 E$16.IN1
S$5  (via drill 0.6)
  Bottom 1.93: E$16.IN2 88.9,45.72 88.9,20.32 81.28,20.32 | 81.28,20.32 v78.74,20.32 E$11.AMINUS | 81.28,20.32 E$19.IN2
S$6
  Bottom 1.93: E$33.IN2 76.2,53.34 E$32.IN1 76.2,48.26 E$34.P$1
S$7
  Bottom 1.93: E$11.APLUS 78.74,17.78 78.74,15.24 E$20.IN1 E$21.IN1
S$8  (via drill 0.6)
  Bottom 1.93: E$11.AOUT v78.74,22.86 81.28,22.86 E$19.IN1 E$22.IN1
S$9  (via drill 0.6)
  Bottom 1.93: E$18.P$1 68.58,60.96 | 68.58,60.96 68.58,63.5 E$38.IN2 v73.66,63.5 | 68.58,60.96 E$55.P$1
S$10
  Bottom 1.93: 83.82,10.16 E$11.BMINUS | 83.82,10.16 88.9,10.16 88.9,17.78 E$22.IN2 | 83.82,10.16 E$23.IN1
S$11
  Bottom 1.93: E$23.IN2 83.82,7.62 E$11.BOUT
S$12
  Bottom 1.93: E$11.BPLUS E$29.IN1 E$30.IN1
S$14
  Bottom 1.93: E$3.P$3 E$31.IN2 E$32.IN2
S$15
  Bottom 1.93: E$47.IN2 63.5,20.32 71.12,20.32 71.12,45.72 E$59.IN2
S$16
  Bottom 1.93: 68.58,22.86 66.04,22.86 E$2.IN2 E$47.IN1 63.5,22.86 E$50.IN1
S$17
  Bottom 1.93: E$36.P$1 E$35.IN1 78.74,43.18 E$34.P$2
S$18
  Bottom 1.93: 68.58,10.16 60.96,10.16 E$52.IN1 55.88,12.7 E$50.IN2
S$19
  Bottom 1.93: E$75.IN1 E$36.P$2
S$20
  Bottom 1.93: E$43.P$1 81.28,33.02 E$40.IN2 81.28,38.1 E$37.IN1
S$22
  Bottom 1.93: E$52.IN2 60.96,7.62 68.58,7.62
S$23
  Bottom 1.93: E$45.P$1 E$44.IN1 76.2,35.56 E$43.P$2
S$24  (via drill 0.6)
  Bottom 1.93: E$45.P$2 v73.66,30.48 E$46.IN1
S$26
  Bottom 1.93: 68.58,12.7 E$53.IN1 E$54.IN1
S$28
  Bottom 1.93: E$55.P$2 60.96,60.96 E$56.IN1
S$29  (via drill 0.6)
  Bottom 1.93: E$74.P$1 50.8,60.96 | 50.8,60.96 50.8,63.5 E$76.IN2 v55.88,63.5 | 50.8,60.96 E$77.P$1
S$30
  Bottom 1.93: 60.96,15.24 E$48.IN1 | 60.96,15.24 66.04,15.24 66.04,17.78 E$11.CPLUS | 60.96,15.24 E$49.IN1
S$31
  Bottom 1.93: E$18.P$3 E$60.IN2 E$61.IN2
S$32
  Bottom 1.93: E$62.IN2 58.42,53.34 E$61.IN1 58.42,48.26 E$63.P$1
S$33
  Bottom 1.93: E$65.P$1 E$64.IN1 60.96,43.18 E$63.P$2
S$34
  Bottom 1.93: E$67.P$1 63.5,33.02 E$66.IN2 63.5,38.1 E$72.IN1
S$35
  Bottom 1.93: E$69.P$1 E$68.IN1 58.42,35.56 E$67.P$2
S$36  (via drill 0.6)
  Bottom 1.93: E$69.P$2 v55.88,30.48 E$70.IN1
S$37
  Bottom 1.93: E$71.IN1 E$65.P$2
S$38
  Bottom 1.93: E$56.IN2 E$57.IN1 66.04,55.88 E$58.IN2 E$59.IN1
S$39
  Bottom 1.93: E$77.P$2 43.18,60.96 E$78.IN1
S$40  (via drill 0.6)
  Bottom 1.93: E$81.IN2 53.34,45.72 53.34,20.32 45.72,20.32 | 45.72,20.32 v43.18,20.32 E$73.AMINUS | 45.72,20.32 E$82.IN2
S$41
  Bottom 1.93: E$73.APLUS 43.18,17.78 43.18,15.24 E$83.IN1 E$84.IN1
S$42  (via drill 0.6)
  Bottom 1.93: E$73.AOUT v43.18,22.86 45.72,22.86 E$82.IN1 E$85.IN1
S$43
  Bottom 1.93: 48.26,10.16 E$73.BMINUS | 48.26,10.16 53.34,10.16 53.34,17.78 E$85.IN2 | 48.26,10.16 E$86.IN1
S$44
  Bottom 1.93: E$86.IN2 48.26,7.62 E$73.BOUT
S$45
  Bottom 1.93: E$73.BPLUS E$87.IN1 E$88.IN1
S$47
  Bottom 1.93: E$74.P$3 E$89.IN2 E$90.IN2
S$48
  Bottom 1.93: E$91.IN2 40.64,53.34 E$90.IN1 40.64,48.26 E$92.P$1
S$49
  Bottom 1.93: E$94.P$1 E$93.IN1 43.18,43.18 E$92.P$2
S$50
  Bottom 1.93: E$96.P$1 45.72,33.02 E$95.IN2 45.72,38.1 E$109.IN1
S$51
  Bottom 1.93: E$98.P$1 E$97.IN1 40.64,35.56 E$96.P$2
S$52  (via drill 0.6)
  Bottom 1.93: E$98.P$2 v38.1,30.48 E$99.IN1
S$53
  Bottom 1.93: E$108.IN1 E$94.P$2
S$54
  Bottom 1.93: E$78.IN2 E$79.IN1 48.26,55.88 E$80.IN2 E$81.IN1
S$55
  Bottom 1.93: 33.02,22.86 30.48,22.86 30.48,25.4 E$101.IN1 27.94,22.86 E$104.IN1
S$56
  Bottom 1.93: 33.02,10.16 22.86,10.16 E$105.IN1 E$104.IN2
S$57
  Bottom 1.93: E$105.IN2 22.86,7.62 33.02,7.62
S$58
  Bottom 1.93: 33.02,12.7 E$106.IN1 E$107.IN1
S$60
  Bottom 1.93: E$101.IN2 27.94,20.32 35.56,20.32 35.56,45.72 E$116.IN2
S$61
  Bottom 1.93: E$100.IN2 5.08,20.32 15.24,20.32 15.24,27.94 17.78,27.94 17.78,45.72 E$173.IN2
S$62  (via drill 0.6)
  Bottom 1.93: E$110.P$1 33.02,60.96 | 33.02,60.96 33.02,63.5 E$111.IN2 v38.1,63.5 | 33.02,60.96 E$112.P$1
S$63
  Bottom 1.93: E$112.P$2 25.4,60.96 E$113.IN1
S$64
  Bottom 1.93: E$110.P$3 E$117.IN2 E$118.IN2
S$65
  Bottom 1.93: E$119.IN2 22.86,53.34 E$118.IN1 22.86,48.26 E$120.P$1
S$66
  Bottom 1.93: E$122.P$1 E$121.IN1 25.4,43.18 E$120.P$2
S$67
  Bottom 1.93: E$124.P$1 27.94,33.02 E$123.IN2 27.94,38.1 E$129.IN1
S$68
  Bottom 1.93: E$126.P$1 E$125.IN1 22.86,35.56 E$124.P$2
S$69  (via drill 0.6)
  Bottom 1.93: E$126.P$2 v20.32,30.48 E$127.IN1
S$70
  Bottom 1.93: E$128.IN1 E$122.P$2
S$71
  Bottom 1.93: E$113.IN2 E$114.IN1 30.48,55.88 E$115.IN2 E$116.IN1
S$89
  Bottom 1.93: 12.7,22.86 10.16,22.86 | 10.16,22.86 5.08,22.86 | 5.08,22.86 E$161.IN1 | 10.16,22.86 E$157.IN2 | 5.08,22.86 E$100.IN1
S$90
  Bottom 1.93: 12.7,10.16 2.54,10.16 E$162.IN1 E$161.IN2
S$91
  Bottom 1.93: E$162.IN2 2.54,7.62 12.7,7.62
S$92
  Bottom 1.93: 12.7,12.7 E$163.IN1 E$166.IN1
S$94
  Bottom 1.93: E$156.AOUT E$156.AMINUS
S$95
  Bottom 1.93: E$156.BOUT E$156.BMINUS 20.32,5.08
S$96  (via drill 0.6)
  Bottom 1.93: E$167.P$1 15.24,60.96 | 15.24,60.96 15.24,63.5 E$168.IN2 v20.32,63.5 | 15.24,60.96 E$169.P$1
S$97
  Bottom 1.93: E$169.P$2 7.62,60.96 E$170.IN1
S$98
  Bottom 1.93: E$167.P$3 E$174.IN2 E$175.IN2
S$99
  Bottom 1.93: E$176.IN2 5.08,53.34 E$175.IN1 5.08,48.26 E$177.P$1
S$100
  Bottom 1.93: E$179.P$1 E$178.IN1 7.62,43.18 E$177.P$2
S$101
  Bottom 1.93: E$181.P$1 10.16,33.02 E$180.IN2 10.16,38.1 E$186.IN1
S$102
  Bottom 1.93: E$183.P$1 E$182.IN1 5.08,35.56 E$181.P$2
S$103  (via drill 0.6)
  Bottom 1.93: E$183.P$2 v2.54,30.48 E$184.IN1
S$104
  Bottom 1.93: E$185.IN1 E$179.P$2
S$105
  Bottom 1.93: E$170.IN2 E$171.IN1 12.7,55.88 E$172.IN2 E$173.IN1
S$106  (via drill 0.6)
  other vias: 88.9,66.04
S$107
  Bottom 1.93: 60.96,-5.08 78.74,-5.08
S$114
  Bottom 1.93: 40.64,-5.08 58.42,-5.08
S$115
  Bottom 1.93: 0,-5.08 17.78,-5.08
VCC2  (via drill 0.6)  (1 unrouted)
  Top 1.93: v25.4,2.54 v25.4,15.24 | v7.62,2.54 v7.62,15.24
  Bottom 1.93: E$94.P$3 E$97.IN2 E$99.IN2 E$93.IN2 v38.1,48.26 38.1,60.96 40.64,60.96 E$89.IN1 | E$73.VCC 38.1,15.24 38.1,2.54 | 38.1,2.54 v27.94,2.54 v25.4,2.54 v20.32,2.54 | 58.42,2.54 50.8,2.54 | 50.8,2.54 38.1,2.54 | 50.8,2.54 E$84.IN2 | E$122.P$3 E$125.IN2 E$127.IN2 E$121.IN2 v20.32,48.26 20.32,60.96 22.86,60.96 E$117.IN1 | E$36.P$3 E$44.IN2 E$46.IN2 E$35.IN2 v73.66,48.26 73.66,60.96 76.2,60.96 E$31.IN1 | 58.42,2.54 E$49.IN2 | E$11.VCC 73.66,15.24 73.66,2.54 | 73.66,2.54 v63.5,2.54 58.42,2.54 | v88.9,2.54 v86.36,2.54 | v86.36,2.54 73.66,2.54 | v86.36,2.54 E$21.IN2 | E$31.IN1 81.28,66.04 | 81.28,66.04 E$7.IN1 | E$65.P$3 E$68.IN2 E$70.IN2 E$64.IN2 v55.88,48.26 55.88,60.96 58.42,60.96 E$60.IN1 | E$102.IN1 v25.4,15.24 30.48,15.24 30.48,17.78 E$73.CPLUS | v7.62,15.24 E$159.IN1 E$156.CPLUS | v20.32,2.54 v7.62,2.54 | 63.5,66.04 v73.66,66.04 E$31.IN1 | 63.5,66.04 E$38.IN1 | E$60.IN1 63.5,66.04 | 45.72,66.04 v55.88,66.04 E$60.IN1 | 45.72,66.04 E$76.IN1 | E$89.IN1 45.72,66.04 | 27.94,66.04 v38.1,66.04 E$89.IN1 | 27.94,66.04 E$111.IN1 | E$117.IN1 27.94,66.04 | 10.16,66.04 E$168.IN1 | E$179.P$3 E$182.IN2 E$184.IN2 E$178.IN2 2.54,66.04 E$174.IN1 10.16,66.04 | 10.16,66.04 v20.32,66.04 E$117.IN1 | E$156.VCC 17.78,15.24 17.78,2.54 v20.32,2.54 | 81.28,66.04 v83.82,66.04 v86.36,66.04

## Text on the board
Unrouted: X | X
bPlace: 3906 | 3906 | 3906 | 3906 | 3904 | 3906 | 3904 | 3906 | 3904 | 3906 | 3904 | 3906 | 3904 | 3906 | 3904 | 3904 | 3904 | 3904 | 3904 | 3904 | 3904 | 3904 | 3904 | 3904 | 5K | 5K